# Altium PCB LED.PcbDoc
Units mm, origin at the board's own origin, x right, y up, seen from the top; angles counter-clockwise.
Board outline 20 x 20 mm, 2 copper layers (Top Layer, Bottom Layer), stack 1.671 mm thick; 5 components, 4 nets, 10 pads, 1 vias.
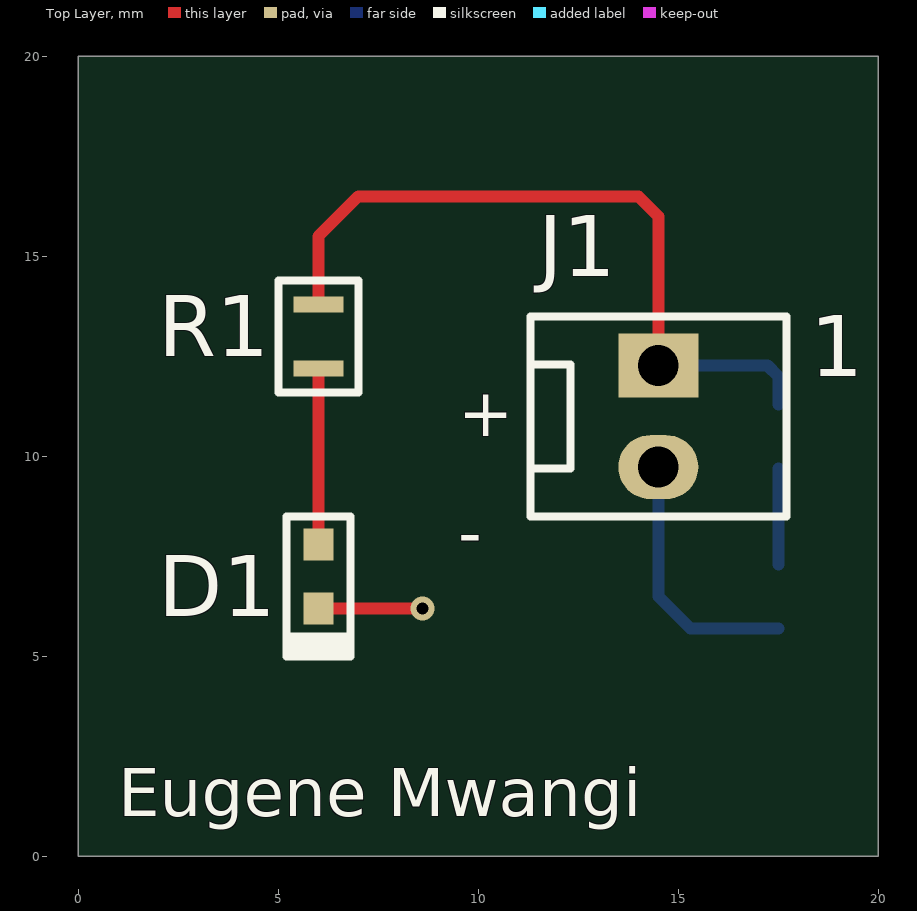
[diagram p0: Top Layer view]
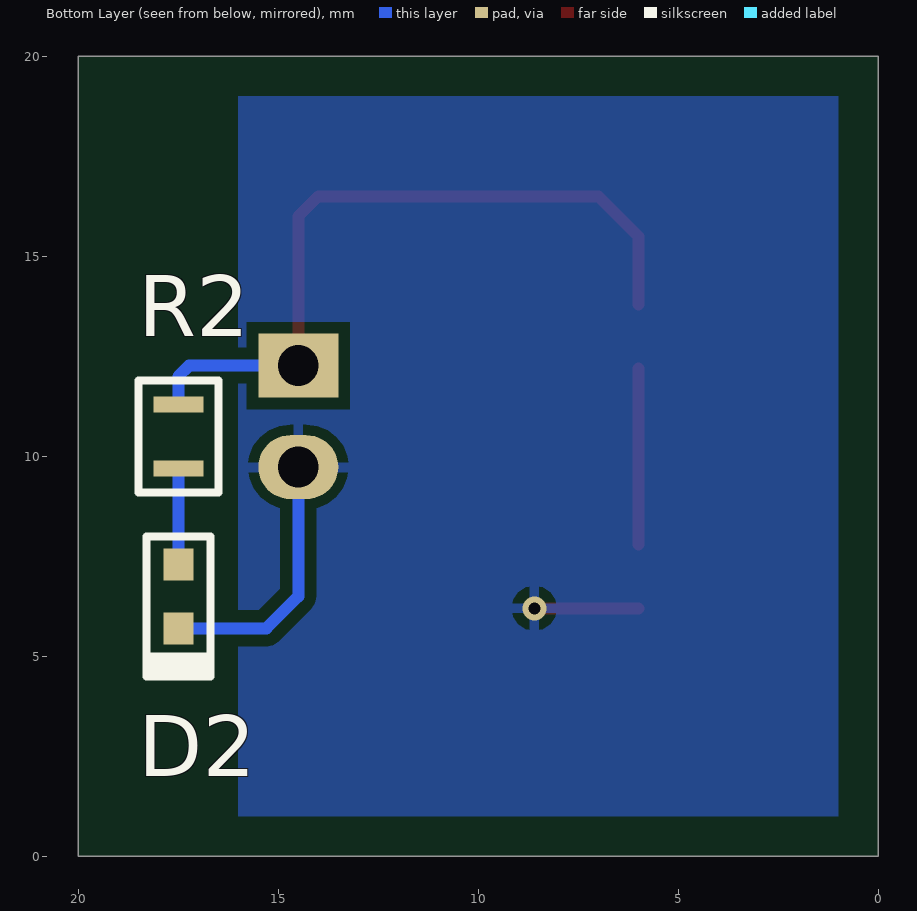
[diagram p1: Bottom Layer view, seen from below]
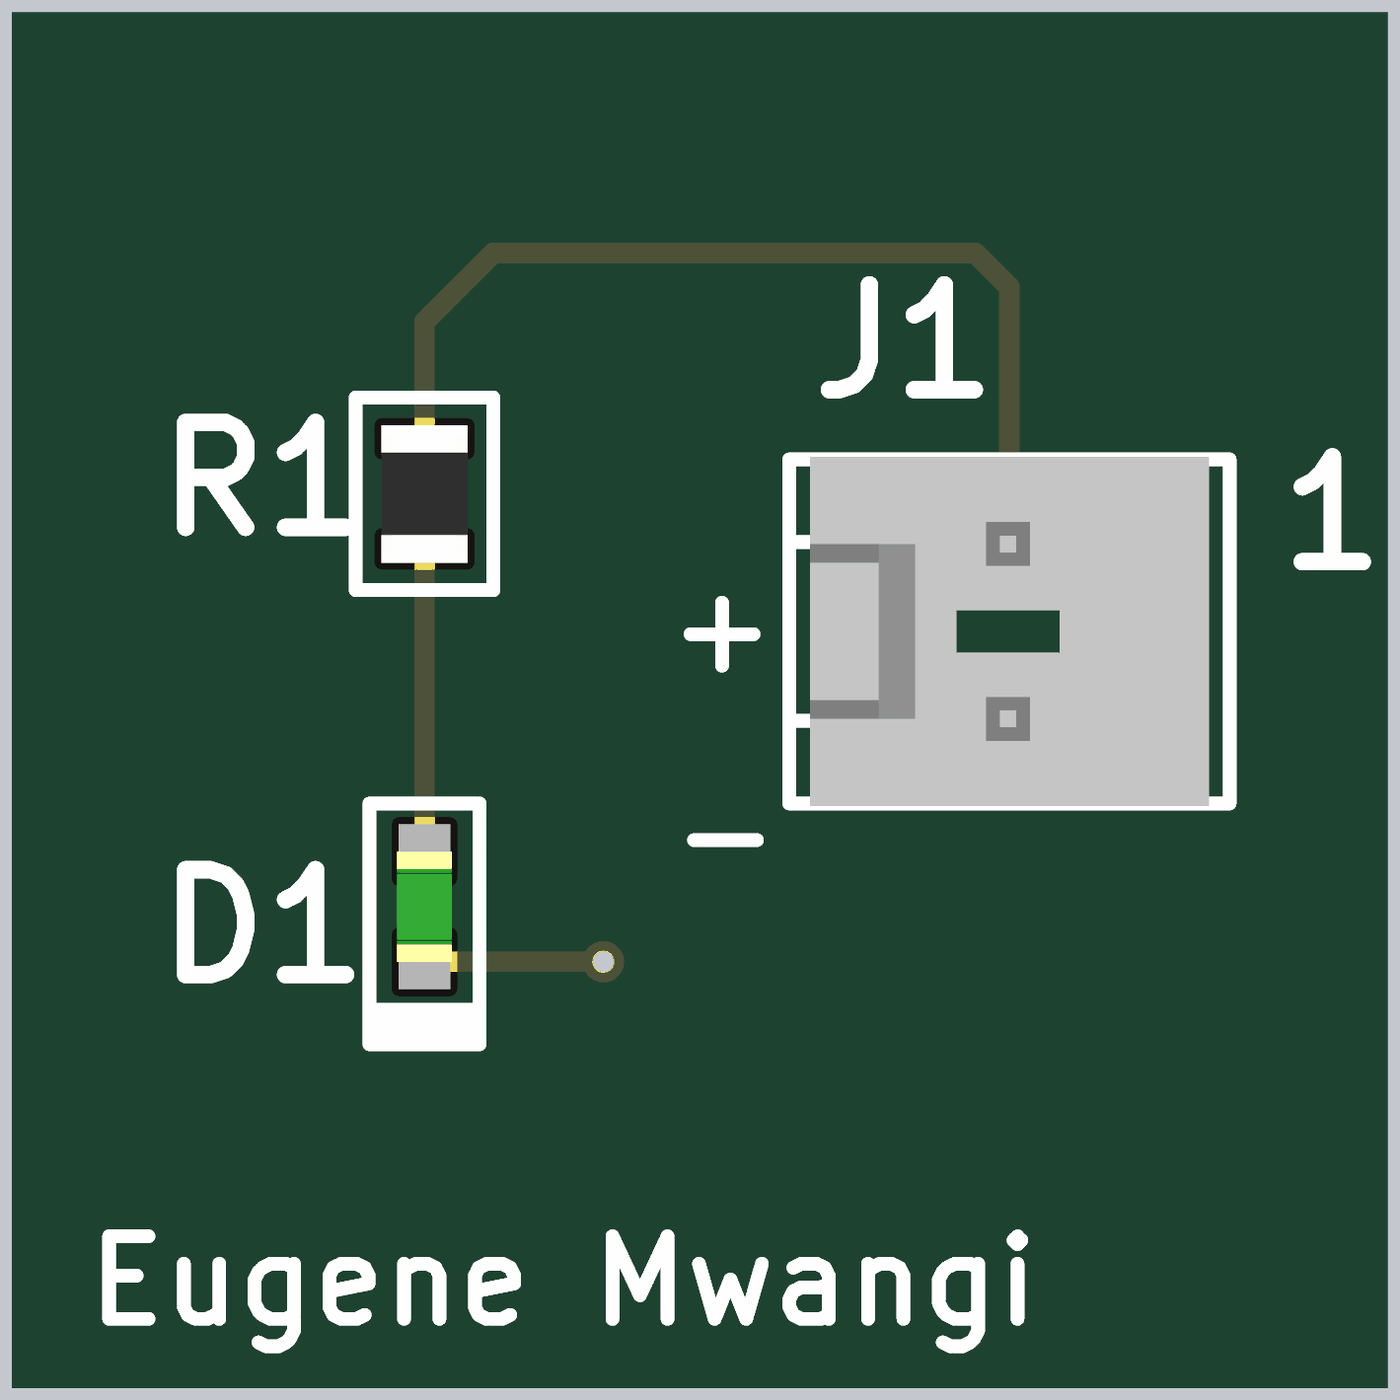
[diagram p2: 3D render of the assembled board from above, using the file's embedded part models]

## Layer stack, top to bottom
Top Solder: solder mask 0.0102, Solder Resist, Dk 3.5
Top Layer: signal copper 0.0356
Dielectric 1: dielectric 1.6, FR-4, Dk 4.8
Bottom Layer: signal copper 0.0356
Bottom Solder: solder mask 0.0102, Solder Resist, Dk 3.5

## Board outline
0,0 20,0 20,20 0,20 0,0

## Design rules (kind name [scope] priority, off if disabled: settings)
Clearance [All] p1: gap=0.3
PolygonConnect [All] p1: connectstyle=Relief reliefconductorwidth=0.254 reliefentries=4 polygonreliefangle="90 Angle" airgapwidth=0.254
RoutingVias [All] p1: holewidth=0.3 width=0.6 viastyle="Through Hole" minholewidth=0.3 minwidth=0.6 maxholewidth=0.3 maxwidth=0.6
SilkToSolderMaskClearance [IsPad] p1: minsilkscreentomaskgap=0.1 clearancetoexposedcopper=TRUE
SolderMaskExpansion [All] p1: expansion=0.102
Width [All] p1: maxlimit=1 minlimit=0.3 preferedwidth=0.5
29 further rules are at their usual default settings.

## Components (designator, comment, footprint, x,y, rotation, side; value= is the part's Value field where it differs from the comment)
D1 "GREEN" LED0603G 6,7 r90 top
D2 "GREEN" LED0603G 17.5,6.5 r90 bottom
J1 "1*2 HEADER" HEADER1X2 14.5,11 r0 top
R1 "360R" R0805 6,13 r90 top
R2 "360R" R0805 17.5,10.5 r90 bottom

## Footprints (in the part's own frame and the unit in brackets; to place one, negate y for a bottom-side part, rotate by r counter-clockwise, add the part's x,y. Pads: shape width x height; smd on the part's side, far side on the other; paste and mask are expansions set on the pad)
HEADER1X2 [mm]
  rect 2x1.6 hole 1.02: 1(0,1.27)
  oval 2x1.6 hole 1.02: 2(0,-1.27)
  silkscreen extent -3.2,-2.5 3.2,2.5, body extent -2.9,-2.54 2.9,2.54, height 11.71
LED0603G [mm]
  rect 0.8x0.75 smd: 1(-0.8,0) 2(0.8,0)
  silkscreen extent -2,-0.8 1.5,0.8, body extent -0.8,-0.4 0.8,0.4, height 0.4
R0805 [mm]
  rect 0.4x1.25 smd: 1(-0.8,0) 2(0.8,0)
  silkscreen extent -1.4,-1 1.4,1, body extent -1,-0.62 1,0.63, height 0.61

## Part data
D1 D2: library part 150060VS55040, "Standard LEDs - SMD WL-SMCD SMD MonoChip 0603 BrtGrn 575nm"
J1: library part 22-11-2026, "Headers & Wire Housings KK 100 Hdr FrLk Vert 02 Ckt Gold"
R1 R2: library part CR0805-JW-361ELF, "Thick Film Resistors - SMD 360ohm 5%"

## Via types
v1: diameter 0.6, hole 0.3, Top Layer to Bottom Layer, tented both sides, 1 vias

## Nets (pads, with @x,y where several pads share a name; then routed paths per layer and width w, separated by ;. In a path a pad name is that pad's centre, name@x,y a point inside that pad or via, vN(x,y) a via of type N, cw(c..) or ccw(c..) an arc to the next point about the centre after c; other vN are vias at no path point)
3V3: J1.1 R1.2 R2.2 | length 18.4
  Top Layer w0.3: R1.2 6,15.5 7,16.5 14,16.5 14.5,16 J1.1
  Bottom Layer w0.3: J1.1 17.23,12.27 17.5,12 R2.2
DIODE1: D1.2 R1.1 | length 4.4
  Top Layer w0.3: D1.2 R1.1
DIODE2: D2.2 R2.1 | length 2.4
  Bottom Layer w0.3: D2.2 R2.1
GND: D1.1 D2.1 J1.2 | length 9.2
  Top Layer w0.3: D1.1 v1(8.6,6.2)
  Bottom Layer w0.3: J1.2 14.5,6.5 15.3,5.7 D2.1

## Polygon pours and split planes (outlines as drawn)
GND on Bottom Layer "Bottom Layer-GND" (solid, pour order 0): 1,1 16,1 16,19 1,19

## Silkscreen, mask and mechanical layers (free items; w line width, h text height)
Top Overlay:
  text "+" at 9.5,10.5 h1.2
  text "-" at 9.5,7.5 h1.2
  text "Eugene Mwangi" at 1,1 h1.2
Board Layout:
  the board outline again, w0.1

## Text inside footprints (layer, text, board x,y; h text height)
J1: Top Overlay "1" at 18.3,12 h1.52